# EAGLE board CT_schematic (EAGLE 7.6.0)

Size 100 x 80 mm. Coordinates in mm from the lower left corner, seen from the top.
Outline: 0,0 100,0 100,80 0,80 0,0
Copper layers (1*16): Top 0.035mm / dielectric 1.5mm / Bottom 0.035mm
Design rules "default": minimum track width 10mil, minimum drill 24mil, track to track 8mil, track to pad 8mil, pad to pad 8mil, via to via 8mil, smd to smd 8mil, copper to edge 40mil, drill to drill 8mil, minimum pad ring 10mil, minimum via ring 8mil, stop-mask expansion 4mil, vias tented up to drill 0mil, thermal gap 10mil

## Footprints (pad centres in the part's own frame; a part is rotated, then mirrored left to right if it is on the bottom)
C0603 = smd 0.8 x 0.8: 1 -0.762,0; 2 0.762,0
C0402 = smd 0.5 x 0.5: 1 -0.508,0; 2 0.508,0
C1210 = smd 1.2 x 2.5: 1 -1.524,0; 2 1.524,0
R0603 = smd 0.8 x 0.8: 1 -0.762,0; 2 0.762,0
EXV-9H = smd 3.505 x 1.676: 1 -2.857,0; 2 2.857,0
IND25X25CZ = smd 2.489 x 3.429: 1 -2.718,0; 2 2.718,0
PJ-037B_PACKAGE = drill 3.7 square: 1 12,0 | drill 3.2 square: 2 6,0
LQFP64 = smd 0.3 x 1.2: 1 -3.75,-5.75; 2 -3.25,-5.75; 3 -2.75,-5.75; 4 -2.25,-5.75; 5 -1.75,-5.75; 6 -1.25,-5.75; 7 -0.75,-5.75; 8 -0.25,-5.75; 9 0.25,-5.75; 10 0.75,-5.75; 11 1.25,-5.75; 12 1.75,-5.75; 13 2.25,-5.75; 14 2.75,-5.75; 15 3.25,-5.75; 16 3.75,-5.75; 33 3.75,5.75; 34 3.25,5.75; 35 2.75,5.75; 36 2.25,5.75; 37 1.75,5.75; 38 1.25,5.75; 39 0.75,5.75; 40 0.25,5.75; 41 -0.25,5.75; 42 -0.75,5.75; 43 -1.25,5.75; 44 -1.75,5.75; 45 -2.25,5.75; 46 -2.75,5.75; 47 -3.25,5.75; 48 -3.75,5.75 | smd 1.2 x 0.3: 17 5.75,-3.75; 18 5.75,-3.25; 19 5.75,-2.75; 20 5.75,-2.25; 21 5.75,-1.75; 22 5.75,-1.25; 23 5.75,-0.75; 24 5.75,-0.25; 25 5.75,0.25; 26 5.75,0.75; 27 5.75,1.25; 28 5.75,1.75; 29 5.75,2.25; 30 5.75,2.75; 31 5.75,3.25; 32 5.75,3.75; 49 -5.75,3.75; 50 -5.75,3.25; 51 -5.75,2.75; 52 -5.75,2.25; 53 -5.75,1.75; 54 -5.75,1.25; 55 -5.75,0.75; 56 -5.75,0.25; 57 -5.75,-0.25; 58 -5.75,-0.75; 59 -5.75,-1.25; 60 -5.75,-1.75; 61 -5.75,-2.25; 62 -5.75,-2.75; 63 -5.75,-3.25; 64 -5.75,-3.75
RFM75-S = smd 0.85 x 1.6: 1 1.7,0.8; 2 2.97,0.8; 3 4.24,0.8; 4 5.51,0.8; 5 6.78,0.8; 6 8.05,0.8; 7 9.32,0.8; 8 10.59,0.8
QFN-32 = smd 0.6 x 0.3: 1 -2.3,1.75; 2 -2.3,1.25; 3 -2.3,0.75; 4 -2.3,0.25; 5 -2.3,-0.25; 6 -2.3,-0.75; 7 -2.3,-1.25; 8 -2.3,-1.75; 17 2.3,-1.75; 18 2.3,-1.25; 19 2.3,-0.75; 20 2.3,-0.25; 21 2.3,0.25; 22 2.3,0.75; 23 2.3,1.25; 24 2.3,1.75 | smd 0.3 x 0.6: 9 -1.75,-2.3; 10 -1.25,-2.3; 11 -0.75,-2.3; 12 -0.25,-2.3; 13 0.25,-2.3; 14 0.75,-2.3; 15 1.25,-2.3; 16 1.75,-2.3; 25 1.75,2.3; 26 1.25,2.3; 27 0.75,2.3; 28 0.25,2.3; 29 -0.25,2.3; 30 -0.75,2.3; 31 -1.25,2.3; 32 -1.75,2.3 | smd 3.2 x 3.2: EXP 0,0
SJ-43515TS-SMT-TR = smd 2.2 x 3: 1 0.6,-7.4; 4 3.4,-7.4 | smd 3 x 3: 2 12.8,-7.4; 5 17,-3 | smd 2 x 3: 3 5.3,0; 6 2.5,0 | drill 1.8: P$7 4.5,-3.69; P$8 11.54,-3.69
WM-64PC = drill 0.6 pad 1: 1 -1,0.95; 2 -1,-0.95
WFDN-8 = smd 0.48 x 0.7: 1 0,0; 2 1.27,0; 3 2.54,0; 4 3.81,0; 5 3.81,4.45; 6 2.54,4.45; 7 1.27,4.45; 8 0,4.45 | smd 4 x 3: 9 1.89,2.25
SSOP-28 = smd 1.5 x 0.4: 1 -3.625,4.225; 2 -3.625,3.575; 3 -3.625,2.925; 4 -3.625,2.275; 5 -3.625,1.625; 6 -3.625,0.975; 7 -3.625,0.325; 8 -3.625,-0.325; 9 -3.625,-0.975; 10 -3.625,-1.625; 11 -3.625,-2.275; 12 -3.625,-2.925; 13 -3.625,-3.575; 14 -3.625,-4.225; 15 3.625,-4.225; 16 3.625,-3.575; 17 3.625,-2.925; 18 3.625,-2.275; 19 3.625,-1.625; 20 3.625,-0.975; 21 3.625,-0.325; 22 3.625,0.325; 23 3.625,0.975; 24 3.625,1.625; 25 3.625,2.275; 26 3.625,2.925; 27 3.625,3.575; 28 3.625,4.225
HTSS-105-01-G-D = drill 1 pad 1.8 square: 1 0,0 | drill 1 pad 1.8: 2 0,2.54; 3 2.54,0; 4 2.54,2.54; 5 5.08,0; 6 5.08,2.54; 7 7.62,0; 8 7.62,2.54; 9 10.16,0; 10 10.16,2.54
FCI_10118193-0001LF = smd 0.4 x 1.35: 1 -1.3,2.675; 2 -0.65,2.675; 3 0,2.675; 4 0.65,2.675; 5 1.3,2.675 | smd 1.6 x 1.4: 6 -3.2,2.45; 7 3.2,2.45 | smd 1.9 x 1.9: 8 -1.2,0; 9 1.2,0 | hole 0.5: -3.3,0; 3.3,0
SOT143B = smd 1 x 0.7: 1 -0.75,-1 | smd 0.6 x 0.7: 2 0.95,-1; 3 0.95,1; 4 -0.95,1
ABS07-32.768KHZ-7-T = smd 1.1 x 2.4: 1 -2.5,0; 2 0,0
ASFL1 = smd 1.7 x 1.5: 1 -1.27,-1.1; 2 1.27,-1.1; 3 1.27,1.1; 4 -1.27,1.1
IR3899MTR1PBF = smd 0.25 x 0.75: 1 0,0; 2 0.5,0; 3 1,0; 4 1.5,0; 5 2,0; 6 2.5,0; 7 3,0 | smd 0.75 x 0.25: 8 3.425,0.78; 9 3.425,1.28; 10 3.425,1.78; 14 -0.425,1.78; 15 -0.425,1.28; 16 -0.425,0.78 | smd 0.3 x 1.95: 11 3.22,3.63 | smd 1.62 x 2.42: 12 1.786,3.8 | smd 1 x 1.95: 13 0.117,3.63 | smd 2.19 x 1.25: 17 1.51,1.26
SON-6 = smd 0.55 x 0.3: 1 -0.355,0.5 | smd 0.52 x 0.3: 2 -0.37,0; 3 -0.37,-0.5; 4 0.37,-0.5; 5 0.37,0; 6 0.37,0.5
SW_4-1437565-2 = smd 1.4 x 2.1: 1 -2.23,4.55; 2 -2.23,-4.55; 3 2.23,4.55; 4 2.23,-4.55
LGM67K-G1J2-24-Z = smd 0.8 x 1.4: A -2,0; C 0,0
NC7SZ125M5X = smd 1.3 x 0.7: 1 -1.3,0.95; 2 -1.3,0; 3 -1.3,-0.95; 4 1.3,-0.95; 5 1.3,0.95

## Placement (x,y rotation side)
C1  1e-06  [C0603]  -86.36,87.63 0 top  (outside the outline)
C2  1e-07  [C0603]  -90.17,87.63 0 top  (outside the outline)
C3  1e-07  [C0603]  -15.24,92.71 0 top  (outside the outline)
C4  1e-07  [C0603]  -19.05,92.71 0 top  (outside the outline)
C5  1e-07  [C0603]  -22.86,92.71 0 top  (outside the outline)
C6  1e-07  [C0603]  -26.67,92.71 0 top  (outside the outline)
C7  4.7e-06  [C0603]  -74.93,87.63 0 top  (outside the outline)
C8  1e-07  [C0603]  -30.48,92.71 0 top  (outside the outline)
C9  1e-08  [C0603]  -34.29,92.71 0 top  (outside the outline)
C10  1e-06  [C0603]  -38.1,92.71 0 top  (outside the outline)
C11  1e-11  [C0402]  -43.18,97.79 0 top  (outside the outline)
C12  1e-11  [C0402]  -46.99,97.79 0 top  (outside the outline)
C13  1e-07  [C0402]  -50.8,97.79 0 top  (outside the outline)
C14  1e-06  [C0603]  -41.91,92.71 0 top  (outside the outline)
C15  1e-06  [C0603]  -45.72,92.71 0 top  (outside the outline)
C16  1e-06  [C0603]  -49.53,92.71 0 top  (outside the outline)
C17  1e-06  [C0603]  -53.34,92.71 0 top  (outside the outline)
C18  1e-06  [C0603]  -57.15,92.71 0 top  (outside the outline)
C19  1e-06  [C0603]  -60.96,92.71 0 top  (outside the outline)
C20  1e-06  [C0603]  -64.77,92.71 0 top  (outside the outline)
C21  1e-06  [C0603]  -68.58,92.71 0 top  (outside the outline)
C22  1e-07  [C0402]  -54.61,97.79 0 top  (outside the outline)
C23  1e-07  [C0402]  -58.42,97.79 0 top  (outside the outline)
C24  1e-07  [C0402]  -62.23,97.79 0 top  (outside the outline)
C25  1e-07  [C0402]  -66.04,97.79 0 top  (outside the outline)
C26  1e-06  [C0603]  -72.39,92.71 0 top  (outside the outline)
C27  1e-07  [C0402]  -69.85,97.79 0 top  (outside the outline)
C28  1e-07  [C0402]  -73.66,97.79 0 top  (outside the outline)
C29  1e-07  [C0402]  -77.47,97.79 0 top  (outside the outline)
C30  1e-07  [C0402]  -81.28,97.79 0 top  (outside the outline)
C31  1e-07  [C0402]  -85.09,97.79 0 top  (outside the outline)
C32  1e-07  [C0402]  -88.9,97.79 0 top  (outside the outline)
C33  1e-08  [C0402]  -15.24,102.87 0 top  (outside the outline)
C34  1e-08  [C0402]  -19.05,102.87 0 top  (outside the outline)
C35  0.0001  [C1210]  -57.15,74.93 0 top  (outside the outline)
C36  2.2e-06  [C0603]  -78.74,87.63 0 top  (outside the outline)
C37  1e-07  [C0402]  -22.86,102.87 0 top  (outside the outline)
C38  1e-07  [C0402]  -26.67,102.87 0 top  (outside the outline)
C39  8.2e-09  [C0402]  -35.56,97.79 0 top  (outside the outline)
C40  2.7406851011734e-07  [R0603]  -80.01,73.66 0 top  (outside the outline)
C43  0.0001  [C1210]  -63.5,74.93 0 top  (outside the outline)
C44  2.2e-06  [C0603]  -82.55,87.63 0 top  (outside the outline)
C45  1e-07  [C0402]  -30.48,102.87 0 top  (outside the outline)
C46  1e-07  [C0402]  -34.29,102.87 0 top  (outside the outline)
C47  8.2e-09  [C0402]  -39.37,97.79 0 top  (outside the outline)
C48  2.7406851011734e-07  [R0603]  -90.17,73.66 0 top  (outside the outline)
C51  1e-07  [C0402]  -38.1,102.87 0 top  (outside the outline)
C52  0.0001  [EXV-9H]  -63.5,66.04 0 top  (outside the outline)
C53  0.0001  [EXV-9H]  -74.93,66.04 0 top  (outside the outline)
C54  1e-08  [C0402]  -41.91,102.87 0 top  (outside the outline)
I1  6.8e-07  [IND25X25CZ]  -85.09,66.04 0 top  (outside the outline)
I2  6.8e-07  [IND25X25CZ]  -17.78,76.2 0 top  (outside the outline)
J1  PJ-037B  [PJ-037B_PACKAGE]  -83.82,30.48 0 top  (outside the outline)
R2  1000.0  [R0603]  -76.2,92.71 0 top  (outside the outline)
R4  4700.0  [R0603]  -80.01,92.71 0 top  (outside the outline)
R5  10000.0  [R0603]  -30.48,87.63 0 top  (outside the outline)
R6  10000.0  [R0603]  -35.56,87.63 0 top  (outside the outline)
R7  10000.0  [R0603]  -40.64,87.63 0 top  (outside the outline)
R8  1270.0  [R0603]  -83.82,92.71 0 top  (outside the outline)
R9  1270.0  [R0603]  -87.63,92.71 0 top  (outside the outline)
R10  100000.0  [R0603]  -77.47,82.55 0 top  (outside the outline)
R11  100000.0  [R0603]  -82.55,82.55 0 top  (outside the outline)
R12  100000.0  [R0603]  -87.63,82.55 0 top  (outside the outline)
R13  100000.0  [R0603]  -15.24,87.63 0 top  (outside the outline)
R14  0.1  [R0603]  -15.24,97.79 0 top  (outside the outline)
R15  4030.2416170974  [R0603]  -19.05,82.55 0 top  (outside the outline)
R16  2878.7440122125  [R0603]  -26.67,82.55 0 top  (outside the outline)
R17  63.40896969697  [R0603]  -64.77,82.55 0 top  (outside the outline)
R18  130.0  [R0603]  -19.05,97.79 0 top  (outside the outline)
R19  39000.0  [R0603]  -45.72,87.63 0 top  (outside the outline)
R20  49900.0  [R0603]  -50.8,87.63 0 top  (outside the outline)
R21  5251.2214765101  [R0603]  -34.29,82.55 0 top  (outside the outline)
R22  0.1  [R0603]  -22.86,97.79 0 top  (outside the outline)
R23  4030.2416170974  [R0603]  -41.91,82.55 0 top  (outside the outline)
R24  719.68600305311  [R0603]  -49.53,82.55 0 top  (outside the outline)
R25  63.40896969697  [R0603]  -72.39,82.55 0 top  (outside the outline)
R26  130.0  [R0603]  -26.67,97.79 0 top  (outside the outline)
R27  39000.0  [R0603]  -55.88,87.63 0 top  (outside the outline)
R28  49900.0  [R0603]  -60.96,87.63 0 top  (outside the outline)
R29  5251.2214765101  [R0603]  -57.15,82.55 0 top  (outside the outline)
R30  10000.0  [R0603]  -66.04,87.63 0 top  (outside the outline)
R31  10000.0  [R0603]  -71.12,87.63 0 top  (outside the outline)
R32  9100.0  [R0603]  -30.48,97.79 0 top  (outside the outline)
R33  680000.0  [R0603]  -20.32,87.63 0 top  (outside the outline)
R34  120000.0  [R0603]  -25.4,87.63 0 top  (outside the outline)
U1  STM32L475RCT7  [LQFP64]  -24.13,44.45 0 top  (outside the outline)
U2  RFM75-S  [RFM75-S]  -26.67,3.81 0 top  (outside the outline)
U3  SGTL5000XNAA3  [QFN-32]  -54.61,55.88 0 top  (outside the outline)
U4  SJ-43515TS-SMT-TR  [SJ-43515TS-SMT-TR]  -66.04,10.16 0 top  (outside the outline)
U5  SJ-43515TS-SMT-TR  [SJ-43515TS-SMT-TR]  -39.37,33.02 0 top  (outside the outline)
U6  SJ-43515TS-SMT-TR  [SJ-43515TS-SMT-TR]  -67.31,33.02 0 top  (outside the outline)
U7  WM-64PCT  [WM-64PC]  -40.64,57.15 0 top  (outside the outline)
U8  SST26VF064B-104I/MF  [WFDN-8]  -31.75,54.61 0 top  (outside the outline)
U9  ST3241EBPR  [SSOP-28]  -34.29,7.62 0 top  (outside the outline)
U10  HTSS-105-01-G-D  [HTSS-105-01-G-D]  -74.93,54.61 0 top  (outside the outline)
U11  10118193-0001LF  [FCI_10118193-0001LF]  -53.34,66.04 0 top  (outside the outline)
U12  prtr5v0u2ax  [SOT143B]  -54.61,102.87 0 top  (outside the outline)
U13  ABS07-32.768KHZ-7-T  [ABS07-32.768KHZ-7-T]  -36.83,76.2 0 top  (outside the outline)
U14  ASFL-24.57MHZ-NCS  [ASFL1]  -27.94,67.31 0 top  (outside the outline)
U15  ASFL1-25MHZ-NCS  [ASFL1]  -44.45,67.31 0 top  (outside the outline)
U16  IR3899MTR1PBF  [IR3899MTR1PBF]  -62.23,40.64 0 top  (outside the outline)
U17  IR3899MTR1PBF  [IR3899MTR1PBF]  -77.47,40.64 0 top  (outside the outline)
U18  TPS3895ADRYR  [SON-6]  -58.42,101.6 0 top  (outside the outline)
U19  4-1437565-2  [SW_4-1437565-2]  -45.72,44.45 0 top  (outside the outline)
U20  Q65110A2395  [LGM67K-G1J2-24-Z]  -45.72,74.93 0 top  (outside the outline)
U21  nc7sz125m5x  [NC7SZ125M5X]  -68.58,73.66 0 top  (outside the outline)

## Library data of the parts
C1-C40 C43-C48 C51-C54 I1 I2 J1 R2 R4-R34 U1-U21 = circuit_tree

## Nets
CLK_CRYSTAL_U1_3: C11.1 U1.3 U13.1
CLK_CRYSTAL_U1_4: C12.1 U1.4 U13.2
CLK_U1_5: U1.5 U15.3
CLK_U3_21: U3.21 U14.3
GND: C1.2 C2.2 C3.2 C4.2 C5.2 C6.2 C7.2 C8.2 C9.2 C10.2 C11.2 C12.2 C13.2 C14.2 C22.2 C23.2 C24.2 C25.2 C26.2 C27.2 C28.2 C31.2 C32.2 C33.2 C34.2 C36.2 C37.2 C38.2 C44.2 C45.2 C46.2 C51.2 C52.2 C53.2 C54.2 J1.2 R2.2 R5.2 R9.2 R14.1 R14.2 R16.2 R19.2 R21.2 R22.1 R22.2 R24.2 R27.2 R29.2 R32.2 R34.2 U1.12 U1.18 U1.31 U1.47 U1.63 U2.1 U3.1 U3.3 U3.7 U3.EXP U5.1 U6.1 U7.2 U8.4 U8.9 U9.23 U9.25 U10.9 U11.5 U11.6 U11.7 U11.8 U11.9 U12.1 U14.2 U15.2 U16.4 U16.11 U16.17 U17.4 U17.11 U17.17 U18.2 U20.C U21.1 U21.3
NET_U1_7: R4.1 U1.7 U21.4
NET_U1_60: R5.1 U1.60
NET_U1_61: U20.A
NET_U1_62: U19.3 U19.4
NET_U2_3: R6.1 U2.3
NET_U3_10: C25.1 U3.10
NET_U3_29: R8.1 U3.29
NET_U3_31: R9.1 U3.31
NET_U4_1: U3.4 U4.1
NET_U4_2: U3.2 U4.2
NET_U4_5: U3.6 U4.5
NET_U5_2: C16.1 U5.2
NET_U5_5: C15.1 U5.5
NET_U5_11: C16.2
NET_U5_12: C15.2
NET_U6_2: C18.1 C19.1 U6.2
NET_U6_5: C17.1 U6.5
NET_U6_13: C18.2 C19.2
NET_U6_14: C17.2
NET_U7_1: C20.1 C21.1 C26.1 U3.16 U7.1
NET_U7_15: C20.2 C21.2
NET_U9_1: C30.1 U9.1
NET_U9_2: C30.2 U9.2
NET_U9_3: C32.1 U9.3
NET_U9_22: R13.1 U9.22
NET_U9_24: C29.2 U9.24
NET_U9_27: C31.1 U9.27
NET_U9_28: C29.1 U9.28
NET_U10_3: U9.4 U10.3
NET_U10_4: U9.5 U10.4
NET_U10_5: U9.9 U10.5
NET_U10_6: U9.10 U10.6
NET_U16_1: C39.1 R15.1 R16.1 R17.1 R18.1 U16.1 U16.8
NET_U16_2: C38.1 U16.2
NET_U16_3: C39.2 C40.1 C40.2 U16.3
NET_U16_5: R19.1 U16.5
NET_U16_10: C36.1 U16.10
NET_U16_12: C35.1 I1.1 U16.12
NET_U16_13: U16.13
NET_U16_14: C35.2 U16.14
NET_U16_15: R20.1 R21.1 U16.15
NET_U16_ATNET_3: I1.2 R15.2
NET_U16_ATNET_4: C40.2 R17.2
NET_U16_ATNET_5: R18.2
NET_U17_1: C47.1 R23.1 R24.1 R25.1 R26.1 U17.1 U17.8
NET_U17_2: C46.1 U17.2
NET_U17_3: C47.2 C48.1 C48.2 U17.3
NET_U17_5: R27.1 U17.5
NET_U17_10: C44.1 U17.10
NET_U17_12: C43.1 I2.1 U17.12
NET_U17_13: U17.13
NET_U17_14: C43.2 U17.14
NET_U17_15: R28.1 R29.1 U17.15
NET_U17_ATNET_3: I2.2 R23.2
NET_U17_ATNET_4: C48.2 R25.2
NET_U17_ATNET_5: R26.2
NET_U18_1: R31.1 R32.1 U18.1
NET_U18_3: R33.2 R34.1 U18.3
NET_U18_4: R30.1 U18.4 U21.2
NET_U19_1: R2.1 U19.1 U19.2
PROC_LPUART1_CTS: U1.34 U9.13
PROC_LPUART1_RTS: U1.33 U9.18
PROC_LPUART1_RX: U1.8 U9.19
PROC_LPUART1_TX: U1.9 U9.14
PROC_QUADSPI_BK1_IO0: U1.27 U8.5
PROC_QUADSPI_BK1_IO1: U1.26 U8.2
PROC_QUADSPI_BK1_IO2: R11.1 U1.23 U8.3
PROC_QUADSPI_BK1_IO3: R12.1 U1.22 U8.7
PROC_QUADSPI_CLK: U1.29 U8.6
PROC_QUADSPI_NCS: R10.1 U1.30 U8.1
PROC_SAI1_FS_B: U1.20 U3.23
PROC_SAI1_SCK_B: U1.55 U3.24
PROC_SAI1_SD_B: U1.57 U3.25
PROC_SPI3_MISO: U1.52 U2.7
PROC_SPI3_MOSI: U1.53 U2.6
PROC_SPI3_NSS: R7.1 U1.50 U2.4
PROC_SPI3_SCK: U1.51 U2.5
PROC_USB_OTG_FS_DM: U1.44 U11.2 U12.3
PROC_USB_OTG_FS_DP: U1.45 U11.3 U12.2
PROC_USB_OTG_FS_VBUS: U1.42 U11.1 U12.4
VCC_S1_16V5: C37.1 C45.1 C52.1 C53.1 J1.1 R20.2 R28.2 U16.9 U17.9
VCC_TIER1_1V2: C22.1 I1.2 R15.2 U3.30
VCC_TIER1_3V3: C1.1 C2.1 C3.1 C4.1 C5.1 C6.1 C7.1 C8.1 C9.1 C10.1 C13.1 C14.1 C23.1 C24.1 C27.1 C28.1 C33.1 C34.1 C51.1 C54.1 I2.2 R4.2 R6.2 R7.2 R8.2 R10.2 R11.2 R12.2 R13.2 R23.2 R30.2 R31.2 R33.1 U1.1 U1.13 U1.19 U1.32 U1.48 U1.64 U2.2 U3.5 U3.20 U8.8 U9.26 U14.4 U15.4 U18.6 U21.5

## Tracks (layer width: path | path; a pad name or v marks a point on that pad's centre or on a via)
CLK_CRYSTAL_U1_3  (2 unrouted)
CLK_CRYSTAL_U1_4  (2 unrouted)
CLK_U1_5  (1 unrouted)
CLK_U3_21  (1 unrouted)
GND  (86 unrouted)
NET_U1_7  (2 unrouted)
NET_U1_60  (1 unrouted)
NET_U1_62  (1 unrouted)
NET_U2_3  (1 unrouted)
NET_U3_10  (1 unrouted)
NET_U3_29  (1 unrouted)
NET_U3_31  (1 unrouted)
NET_U4_1  (1 unrouted)
NET_U4_2  (1 unrouted)
NET_U4_5  (1 unrouted)
NET_U5_2  (1 unrouted)
NET_U5_5  (1 unrouted)
NET_U6_2  (2 unrouted)
NET_U6_5  (1 unrouted)
NET_U6_13  (1 unrouted)
NET_U7_1  (4 unrouted)
NET_U7_15  (1 unrouted)
NET_U9_1  (1 unrouted)
NET_U9_2  (1 unrouted)
NET_U9_3  (1 unrouted)
NET_U9_22  (1 unrouted)
NET_U9_24  (1 unrouted)
NET_U9_27  (1 unrouted)
NET_U9_28  (1 unrouted)
NET_U10_3  (1 unrouted)
NET_U10_4  (1 unrouted)
NET_U10_5  (1 unrouted)
NET_U10_6  (1 unrouted)
NET_U16_1  (6 unrouted)
NET_U16_2  (1 unrouted)
NET_U16_3  (3 unrouted)
NET_U16_5  (1 unrouted)
NET_U16_10  (1 unrouted)
NET_U16_12  (2 unrouted)
NET_U16_14  (1 unrouted)
NET_U16_15  (2 unrouted)
NET_U16_ATNET_3  (1 unrouted)
NET_U16_ATNET_4  (1 unrouted)
NET_U17_1  (6 unrouted)
NET_U17_2  (1 unrouted)
NET_U17_3  (3 unrouted)
NET_U17_5  (1 unrouted)
NET_U17_10  (1 unrouted)
NET_U17_12  (2 unrouted)
NET_U17_14  (1 unrouted)
NET_U17_15  (2 unrouted)
NET_U17_ATNET_3  (1 unrouted)
NET_U17_ATNET_4  (1 unrouted)
NET_U18_1  (2 unrouted)
NET_U18_3  (2 unrouted)
NET_U18_4  (2 unrouted)
NET_U19_1  (2 unrouted)
PROC_LPUART1_CTS  (1 unrouted)
PROC_LPUART1_RTS  (1 unrouted)
PROC_LPUART1_RX  (1 unrouted)
PROC_LPUART1_TX  (1 unrouted)
PROC_QUADSPI_BK1_IO0  (1 unrouted)
PROC_QUADSPI_BK1_IO1  (1 unrouted)
PROC_QUADSPI_BK1_IO2  (2 unrouted)
PROC_QUADSPI_BK1_IO3  (2 unrouted)
PROC_QUADSPI_CLK  (1 unrouted)
PROC_QUADSPI_NCS  (2 unrouted)
PROC_SAI1_FS_B  (1 unrouted)
PROC_SAI1_SCK_B  (1 unrouted)
PROC_SAI1_SD_B  (1 unrouted)
PROC_SPI3_MISO  (1 unrouted)
PROC_SPI3_MOSI  (1 unrouted)
PROC_SPI3_NSS  (2 unrouted)
PROC_SPI3_SCK  (1 unrouted)
PROC_USB_OTG_FS_DM  (2 unrouted)
PROC_USB_OTG_FS_DP  (2 unrouted)
PROC_USB_OTG_FS_VBUS  (2 unrouted)
VCC_S1_16V5  (8 unrouted)
VCC_TIER1_1V2  (3 unrouted)
VCC_TIER1_3V3  (47 unrouted)